# EAGLE board SCSI_V1.0.1 (EAGLE 4.09), part 1 of 2
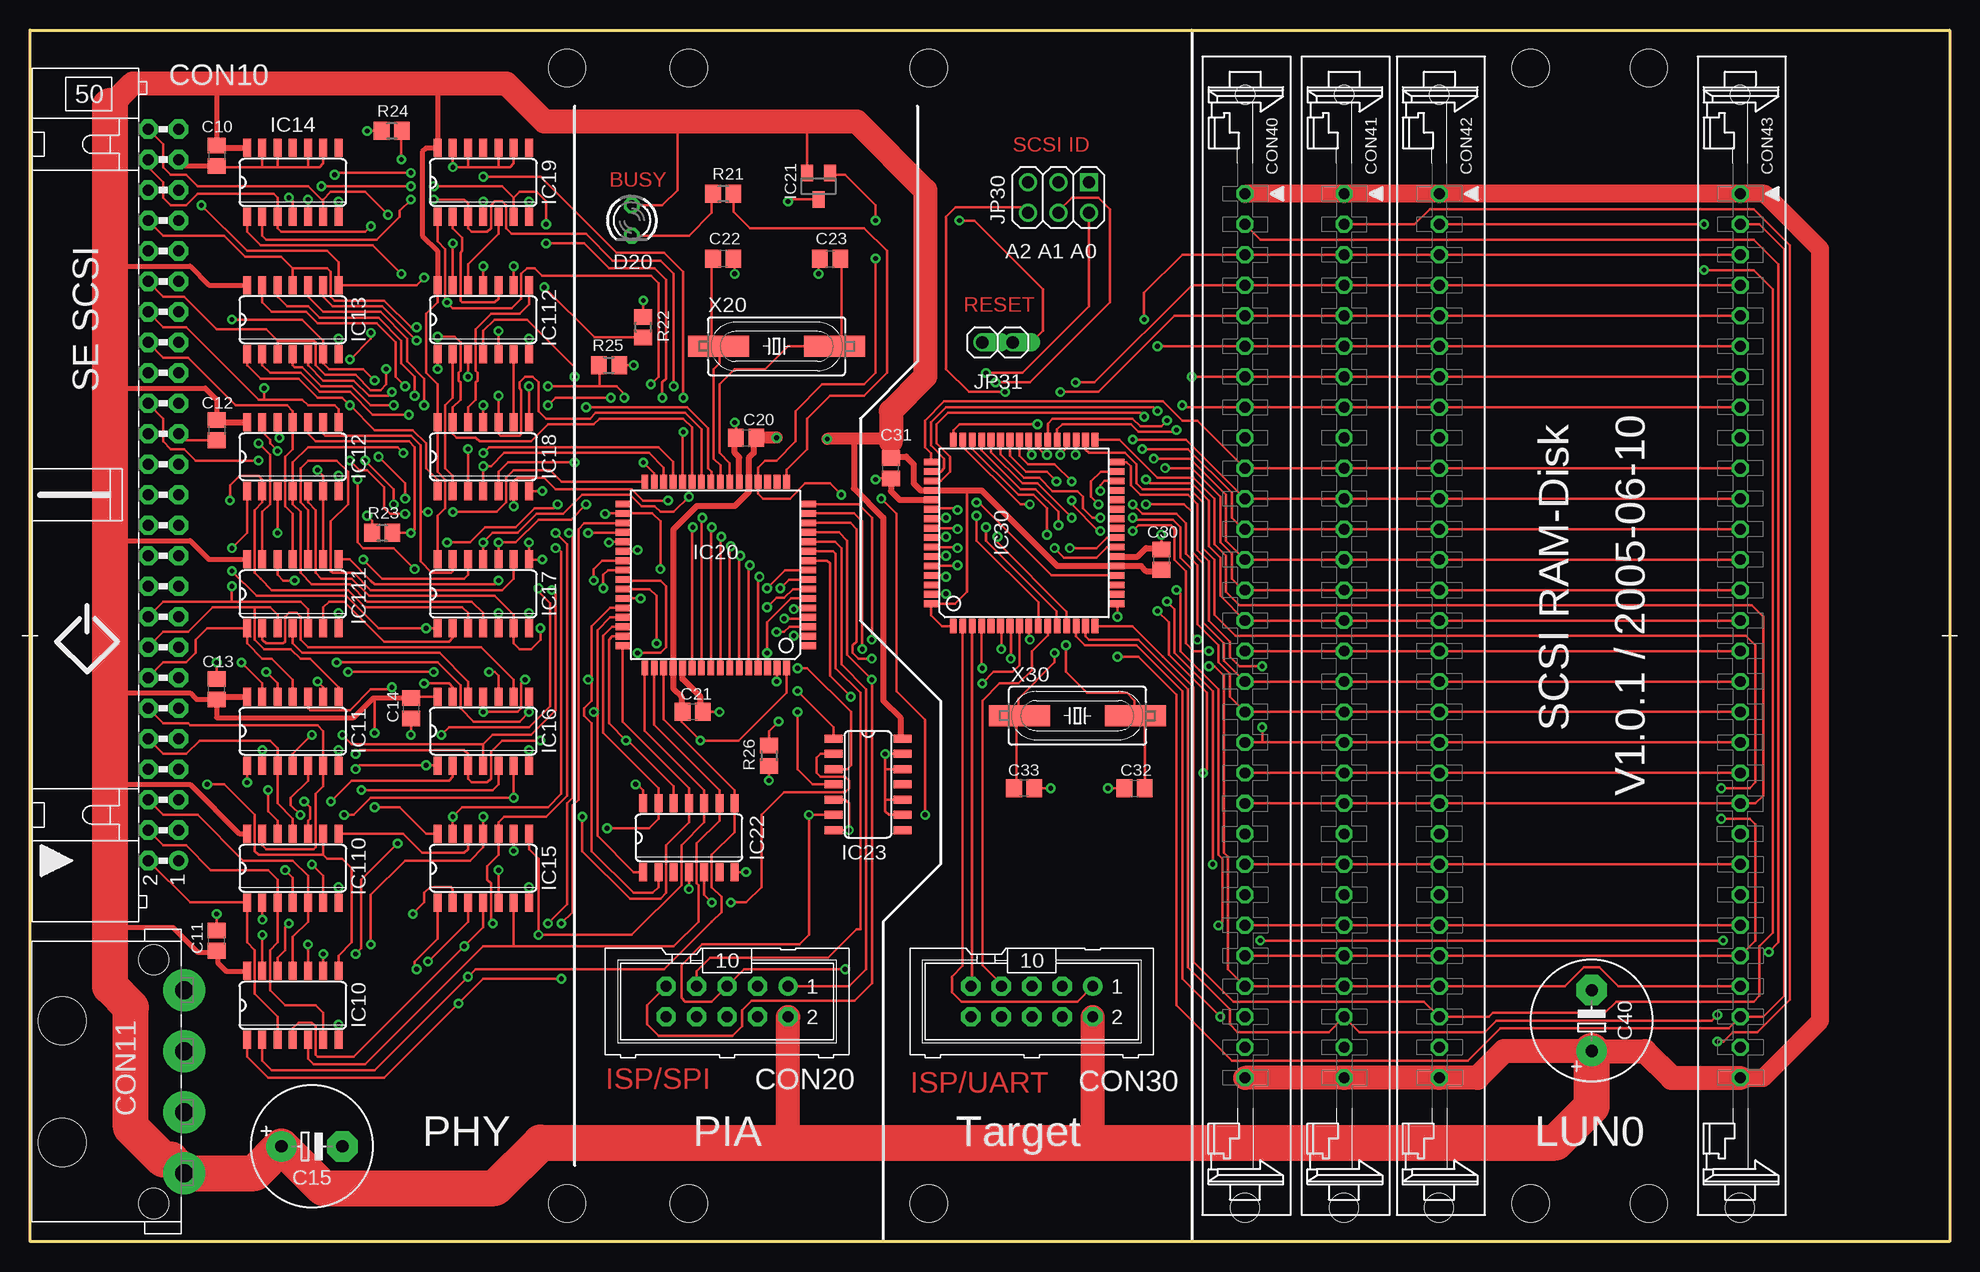
[diagram p0: board, top side]
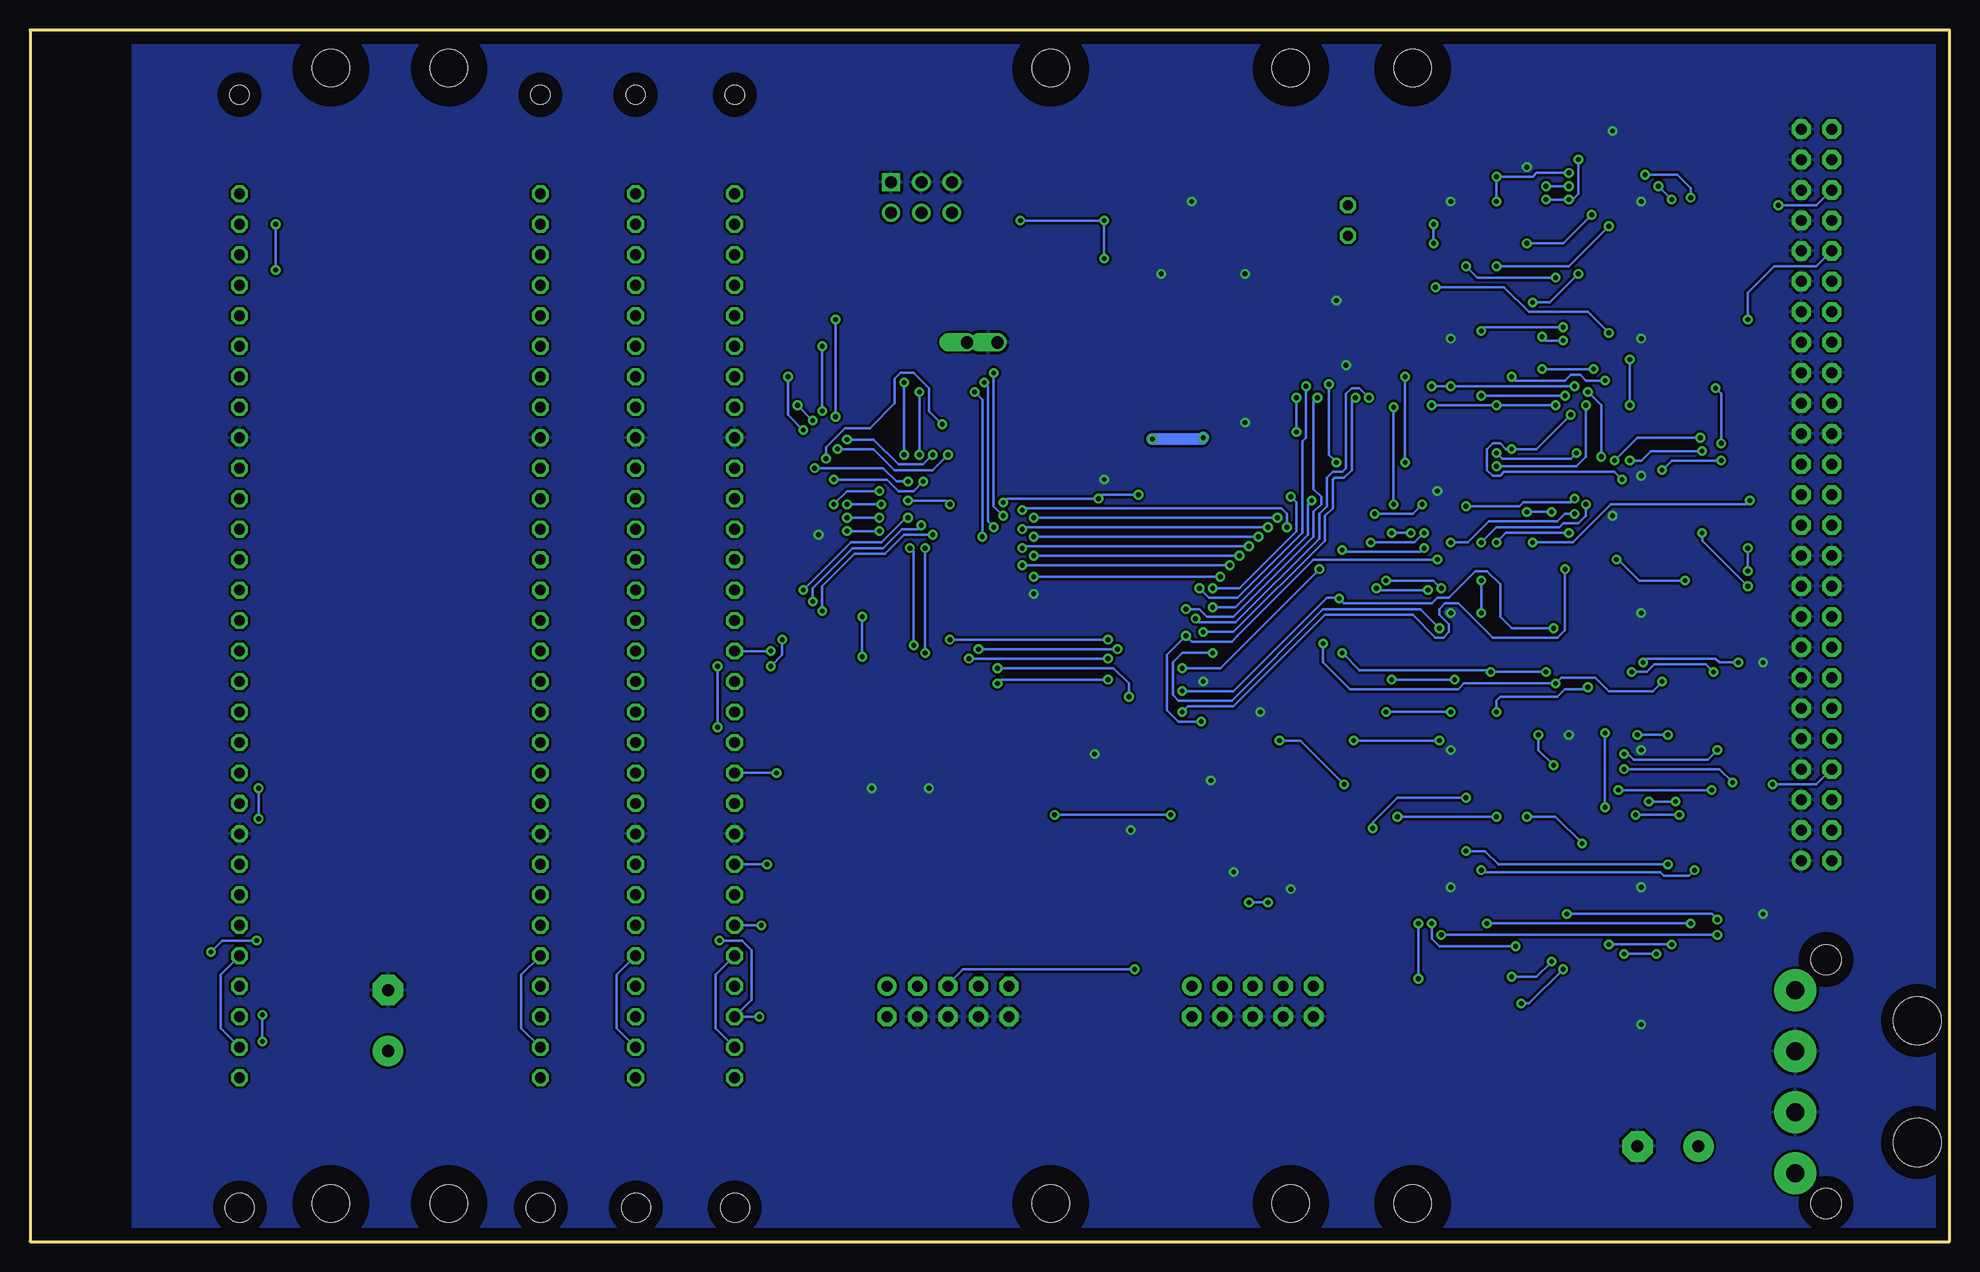
[diagram p1: board, bottom side, seen from below]

Size 160.02 x 100.97 mm. Coordinates in mm from the lower left corner, seen from the top.
Copper layers used: Top, Bottom

## Footprints (pad centres in the part's own frame; a part is rotated, then mirrored left to right if it is on the bottom)
C0805 = smd 1.3 x 1.5: 1 -0.85,0; 2 0.85,0
E5-10,5 = drill 1.016 pad 2.54 round: + -2.54,0 | drill 1.016 pad 2.54 octagon: - 2.54,0
ML50L = drill 0.914 pad 1.6 round: 1 -30.48,-1.27 | drill 0.914 pad 1.6 octagon: 2 -30.48,1.27; 3 -27.94,-1.27; 4 -27.94,1.27; 5 -25.4,-1.27; 6 -25.4,1.27; 7 -22.86,-1.27; 8 -22.86,1.27; 9 -20.32,-1.27; 10 -20.32,1.27; 11 -17.78,-1.27; 12 -17.78,1.27; 13 -15.24,-1.27; 14 -15.24,1.27; 15 -12.7,-1.27; 16 -12.7,1.27; 17 -10.16,-1.27; 18 -10.16,1.27; 19 -7.62,-1.27; 20 -7.62,1.27; 21 -5.08,-1.27; 22 -5.08,1.27; 23 -2.54,-1.27; 24 -2.54,1.27; 25 0,-1.27; 26 0,1.27; 27 2.54,-1.27; 28 2.54,1.27; 29 5.08,-1.27; 30 5.08,1.27; 31 7.62,-1.27; 32 7.62,1.27; 33 10.16,-1.27; 34 10.16,1.27; 35 12.7,-1.27; 36 12.7,1.27; 37 15.24,-1.27; 38 15.24,1.27; 39 17.78,-1.27; 40 17.78,1.27; 41 20.32,-1.27; 42 20.32,1.27; 43 22.86,-1.27; 44 22.86,1.27; 45 25.4,-1.27; 46 25.4,1.27; 47 27.94,-1.27; 48 27.94,1.27; 49 30.48,-1.27; 50 30.48,1.27
827-001-2 = drill 1.5 pad 3.5 round: 1(12V) 7.62,-10.16; 2 2.54,-10.16; 3 -2.54,-10.16; 4(5V) -7.62,-10.16 | hole 4: -5.08,0; 5.08,0 | hole 2.5: -10.16,-7.62; 10.16,-7.62
ML10 = drill 0.914 pad 1.6 round: 1 -5.08,-1.27 | drill 0.914 pad 1.6 octagon: 2 -5.08,1.27; 3 -2.54,-1.27; 4 -2.54,1.27; 5 0,-1.27; 6 0,1.27; 7 2.54,-1.27; 8 2.54,1.27; 9 5.08,-1.27; 10 5.08,1.27
SIMM30 = drill 0.9 octagon: 1 36.83,0; 2 34.29,0; 3 31.75,0; 4 29.21,0; 5 26.67,0; 6 24.13,0; 7 21.59,0; 8 19.05,0; 9 16.51,0; 10 13.97,0; 11 11.43,0; 12 8.89,0; 13 6.35,0; 14 3.81,0; 15 1.27,0; 16 -1.27,0; 17 -3.81,0; 18 -6.35,0; 19 -8.89,0; 20 -11.43,0; 21 -13.97,0; 22 -16.51,0; 23 -19.05,0; 24 -21.59,0; 25 -24.13,0; 26 -26.67,0; 27 -29.21,0; 28 -31.75,0; 29 -34.29,0; 30 -36.83,0 | hole 2.413: -47.65,0.025 | hole 1.6: 45.085,0
LED3MM = drill 0.813 octagon: A -1.27,0; K 1.27,0
SO14 = smd 0.66 x 1.5: 1 -3.81,-2.873; 2 -2.54,-2.873; 3 -1.27,-2.873; 4 0,-2.873; 5 1.27,-2.873; 6 2.54,-2.873; 7 3.81,-2.873; 8 3.81,2.873; 9 2.54,2.873; 10 1.27,2.873; 11 0,2.873; 12 -1.27,2.873; 13 -2.54,2.873; 14 -3.81,2.873
TQFP64 = smd 1.194 x 0.559: 1 -7.76,5.905; 2 -7.76,5.118; 3 -7.76,4.331; 4 -7.76,3.543; 5 -7.76,2.756; 6 -7.76,1.968; 7 -7.76,1.181; 8 -7.76,0.394; 9 -7.76,-0.394; 10 -7.76,-1.181; 11 -7.76,-1.968; 12 -7.76,-2.756; 13 -7.76,-3.543; 14 -7.76,-4.331; 15 -7.76,-5.118; 16 -7.76,-5.905; 33 7.76,-5.905; 34 7.76,-5.118; 35 7.76,-4.331; 36 7.76,-3.543; 37 7.76,-2.756; 38 7.76,-1.968; 39 7.76,-1.181; 40 7.76,-0.394; 41 7.76,0.394; 42 7.76,1.181; 43 7.76,1.968; 44 7.76,2.756; 45 7.76,3.543; 46 7.76,4.331; 47 7.76,5.118; 48 7.76,5.905 | smd 0.559 x 1.194: 17 -5.905,-7.76; 18 -5.118,-7.76; 19 -4.331,-7.76; 20 -3.543,-7.76; 21 -2.756,-7.76; 22 -1.968,-7.76; 23 -1.181,-7.76; 24 -0.394,-7.76; 25 0.394,-7.76; 26 1.181,-7.76; 27 1.968,-7.76; 28 2.756,-7.76; 29 3.543,-7.76; 30 4.331,-7.76; 31 5.118,-7.76; 32 5.905,-7.76; 49 5.905,7.76; 50 5.118,7.76; 51 4.331,7.76; 52 3.543,7.76; 53 2.756,7.76; 54 1.968,7.76; 55 1.181,7.76; 56 0.394,7.76; 57 -0.394,7.76; 58 -1.181,7.76; 59 -1.968,7.76; 60 -2.756,7.76; 61 -3.543,7.76; 62 -4.331,7.76; 63 -5.118,7.76; 64 -5.905,7.76
SOT23 = smd 1 x 1.4: 1 -0.95,-1.1; 2 0.95,-1.1; 3 0,1.1
2X03 = drill 1 square: 1 -2.54,-1.27 | drill 1 round: 2 -2.54,1.27; 3 0,-1.27; 4 0,1.27; 5 2.54,-1.27; 6 2.54,1.27
1X02 = drill 1.016 offset: 1 -1.27,0; 2 1.27,0
R0805 = smd 1.3 x 1.5: 1 -0.85,0; 2 0.85,0
FLOPPY = hole 3.1: -115.252,-47.307; -115.252,47.307; -85.09,47.307; -85.09,-47.307; -105.093,47.307; -105.093,-47.307; -34.925,47.307; -34.925,-47.307; -25.082,47.307; -25.082,-47.307
SM49 = smd 5.08 x 1.778: 1 -4.826,0; 2 4.826,0

## Placement (x,y rotation side)
C10  100n  [C0805]  15.56,90.49 270 top
C11  100n  [C0805]  15.56,25.08 90 top
C12  100n  [C0805]  15.56,67.63 270 top
C13  100n  [C0805]  15.56,46.04 90 top
C14  100n  [C0805]  31.75,44.45 270 top
C15  100u  [E5-10,5]  23.5,7.94 0 top
C20  100n  [C0805]  59.69,66.99 0 top
C21  100n  [C0805]  55.24,44.13 180 top
C22  22p  [C0805]  57.78,81.92 180 top
C23  22p  [C0805]  66.67,81.92 0 top
C30  100n  [C0805]  94.3,56.83 270 top
C31  100n  [C0805]  71.75,64.45 90 top
C32  22p  [C0805]  92.08,37.78 0 top
C33  22p  [C0805]  82.87,37.78 180 top
C40  100u  [E5-10,5]  130.18,18.41 90 top
CON10  [ML50L]  11.11,62.23 90 top
CON11  AMP 827-001-2  [827-001-2]  2.7,13.34 90 top
CON20  ISP/SPI  [ML10]  58.1,20 180 top
CON30  ISP/UART  [ML10]  83.5,20 180 top
CON40  [SIMM30]  101.28,50.48 90 top
CON41  [SIMM30]  109.54,50.48 90 top
CON42  [SIMM30]  117.47,50.48 90 top
CON43  [SIMM30]  142.56,50.48 90 top
D20  BUSY  [LED3MM]  50.16,85.09 270 top
IC10  74F38  [SO14]  21.91,19.68 0 top
IC11  74F38  [SO14]  21.91,42.55 0 top
IC12  74F38  [SO14]  21.91,65.41 0 top
IC13  74F38  [SO14]  21.91,76.83 0 top
IC14  74F38  [SO14]  21.91,88.27 0 top
IC15  74ALS125  [SO14]  37.78,31.11 0 top
IC16  74ALS125  [SO14]  37.78,42.55 0 top
IC17  74ALS125  [SO14]  37.78,53.98 0 top
IC18  74ALS125  [SO14]  37.78,65.41 0 top
IC19  74ALS125  [SO14]  37.78,88.27 0 top
IC20  ATmega165  [TQFP64]  57.15,55.56 180 top
IC21  DS1811  [SOT23]  65.72,87.95 180 top
IC22  74HCT280  [SO14]  54.93,33.66 0 top
IC23  74HCT126  [SO14]  69.85,38.1 270 top
IC30  ATmega64  [TQFP64]  82.87,59.05 90 top
IC110  74ALS14  [SO14]  21.91,31.11 0 top
IC111  74ALS14  [SO14]  21.91,53.98 0 top
IC112  74ALS14  [SO14]  37.78,76.83 0 top
JP30  SCSI ID  [2X03]  85.72,87 180 top
JP31  RESET  [1X02]  80.64,74.93 0 top
R21  270  [R0805]  57.78,87.31 180 top
R22  0  [R0805]  51.12,76.2 90 top
R23  560  [R0805]  29.37,59.05 180 top
R24  560  [R0805]  30.16,92.55 180 top
R25  560  [R0805]  48.26,73.03 0 top
R26  560  [R0805]  61.59,40.48 270 top
U$7  [FLOPPY]  160.02,50.48 0 top
X20  16M  [SM49]  62.23,74.61 0 top
X30  16M  [SM49]  87.31,43.81 180 top

## Library data of the parts
C10-C15 C20-C23 C30-C33 C40 R21-R26 = rcl
CON10 CON20 CON30 = con-ml
CON11 CON40-CON43 = con-amp
D20 = led
IC10-IC19 IC22 IC23 IC110-IC112 = 74xx-eu
IC20 IC30 = atmel
IC21 = supervisor
JP30 JP31 = pinhead
U$7 = BOARD
X20 X30 = crystal

## Nets
+5V: C10.1 C11.1 C12.1 C13.1 C14.1 C15.+ C20.2 C21.2 C30.2 C31.2 C40.+ CON11.4(5V) CON20.2 CON30.2 CON40.1 CON40.30 CON41.1 CON41.30 CON42.1 CON42.30 CON43.1 CON43.30 D20.A IC10.14 IC11.14 IC12.14 IC13.14 IC14.14 IC15.14 IC16.14 IC17.14 IC18.14 IC19.14 IC20.21 IC20.52 IC20.64 IC21.2 IC22.14 IC23.14 IC30.1 IC30.21 IC30.52 IC30.64 IC110.14 IC111.14 IC112.14
/ACK: CON10.38 IC12.8 IC111.13
/ATN: CON10.32 IC12.6 IC111.9
/BSY: CON10.36 IC12.11 IC111.11
/C/D: CON10.46 IC13.8 IC112.9
/CAS0: CON40.2 CON40.28 IC30.14
/CAS1: CON41.2 CON41.28 IC30.15
/CAS2: CON42.2 CON42.28 IC30.16
/CAS3: CON43.2 CON43.28 IC30.17
/D0: CON10.2 IC10.3 IC110.1
/D1: CON10.4 IC10.6 IC110.3
/D2: CON10.6 IC10.11 IC110.5
/D3: CON10.8 IC10.8 IC110.9
/D4: CON10.10 IC11.3 IC110.11
/D5: CON10.12 IC11.6 IC110.13
/D6: CON10.14 IC11.11 IC111.1
/D7: CON10.16 IC11.8 IC111.3
/I/O: CON10.50 IC14.6 IC112.13
/MSG: CON10.42 IC13.6 IC112.3
/P: CON10.18 IC12.3 IC111.5
/PIA_ACK: CON20.9 IC20.13 IC30.8
/PIA_IRQ: IC20.16 IC30.9
/PIA_RD: IC20.14 IC30.7
/PIA_WR: IC20.15 IC30.6
/RAS: CON40.27 CON41.27 CON42.27 CON43.27 IC30.43
/RE_ACK: IC12.9 IC17.13 IC20.32
/RE_ATN: IC12.4 IC17.4 IC20.29
/RE_BSY: IC12.12 IC17.10 IC20.25
/RE_C/D: IC13.9 IC18.13 IC20.27
/RE_D0: IC10.1 IC15.1 IC20.35
/RE_D1: IC10.4 IC15.4 IC20.36
/RE_D2: IC10.12 IC15.10 IC20.37
/RE_D3: IC10.9 IC15.13 IC20.38
/RE_D4: IC11.1 IC16.1 IC20.39
/RE_D5: IC11.4 IC16.4 IC20.40
/RE_D6: IC11.12 IC16.10 IC20.41
/RE_D7: IC11.9 IC16.13 IC20.42
/RE_I/O: IC14.4 IC19.4 IC20.28
/RE_MSG: IC13.4 IC18.4 IC20.30
/RE_P: IC12.1 IC17.1 IC20.43 IC23.1
/RE_REQ: IC14.1 IC19.1 IC20.31
/RE_RST: IC13.1 IC18.1 R22.1
/RE_SEL: IC13.12 IC18.10 IC20.26
/REQ: CON10.48 IC14.3 IC112.11
/RESET: CON20.5 CON30.5 IC20.20 IC21.1 IC23.6 IC30.20 JP31.2
/RST: CON10.40 IC13.3 IC112.1
/SEL: CON10.44 IC13.11 IC112.5
/W: CON40.21 CON41.21 CON42.21 CON43.21 IC30.33
ACK: IC12.10 IC17.11 IC20.9 R23.1
ATN: IC12.5 IC17.6 IC20.6
BSY: IC12.13 IC17.8 IC20.2 R26.1
C/D: IC13.10 IC18.11 IC20.4
D0: IC10.2 IC15.3 IC20.51 IC22.8
D1: IC10.5 IC15.6 IC20.50 IC22.9
D2: IC10.13 IC15.8 IC20.49 IC22.10
D3: IC10.10 IC15.11 IC20.48 IC22.11
D4: IC11.2 IC16.3 IC20.47 IC22.12
D5: IC11.5 IC16.6 IC20.46 IC22.13
D6: IC11.13 IC16.8 IC20.45 IC22.1
D7: IC11.10 IC16.11 IC20.44 IC22.2
EN_PHY: IC20.33
GND: C10.2 C11.2 C12.2 C13.2 C14.2 C15.- C20.1 C21.1 C22.1 C23.1 C30.1 C31.1 C32.1 C33.1 C40.- CON10.1 CON10.3 CON10.5 CON10.7 CON10.9 CON10.11 CON10.13 CON10.15 CON10.17 CON10.19 CON10.20 CON10.21 CON10.22 CON10.29 CON10.30 CON10.31 CON10.33 CON10.34 CON10.35 CON10.37 CON10.39 CON10.41 CON10.43 CON10.45 CON10.47 CON10.49 CON11.2 CON11.3 CON20.4 CON20.6 CON20.8 CON20.10 CON30.4 CON30.6 CON30.8 CON30.10 CON40.9 CON40.22 CON41.9 CON41.22 CON42.9 CON42.22 CON43.9 CON43.22 IC10.7 IC11.7 IC12.7 IC13.7 IC14.7 IC14.9 IC14.10 IC14.12 IC14.13 IC15.7 IC16.7 IC17.7 IC18.7 IC19.7 IC19.9 IC19.10 IC19.12 IC19.13 IC20.22 IC20.53 IC20.63 IC21.3 IC22.4 IC22.7 IC23.5 IC23.7 IC23.9 IC23.10 IC23.12 IC23.13 IC30.22 IC30.53 IC30.63 IC110.7 IC111.7 IC112.7 JP30.1 JP30.3 JP30.5 JP31.1 R22.2 R23.2 R24.2 R25.2 R26.2
I/O: IC14.5 IC19.6 IC20.5
ID_A0: IC30.10 JP30.2
ID_A1: IC30.12 JP30.4
ID_A2: IC30.13 JP30.6
MOSI: CON20.1 IC20.12
MSG: IC13.5 IC18.6 IC20.7
N$1: IC15.2 IC110.2
N$3: IC15.5 IC110.4
N$4: IC15.9 IC110.6
N$5: IC20.17 R21.1
N$6: D20.K R21.2
N$7: C33.2 IC30.23 X30.2
N$8: C23.2 IC20.23 X20.2
N$9: C22.2 IC20.24 X20.1
N$10: C32.2 IC30.24 X30.1
N$11: IC15.12 IC110.8
N$12: IC16.2 IC110.10
N$13: IC16.5 IC110.12
N$14: IC16.9 IC111.2
N$15: IC16.12 IC111.4
N$16: IC17.2 IC111.6
N$17: IC17.5 IC111.8
N$18: IC17.9 IC111.10
N$19: IC17.12 IC111.12
N$20: IC18.2 IC112.2
N$21: IC18.5 IC112.4
N$22: IC18.9 IC112.6
N$23: IC18.12 IC112.8
N$24: IC19.2 IC112.10
N$25: IC19.5 IC112.12
ODD_P: IC22.5 IC23.2
P: IC12.2 IC17.3 IC20.34 IC23.3
PD_SCK: CON30.7 IC30.11
PDI: CON30.1 IC30.2
PDO: CON30.9 IC30.3
PIA_A0: IC20.10 IC30.4
PIA_D0: IC20.61 IC30.61
PIA_D1: IC20.60 IC30.60
PIA_D2: IC20.59 IC30.59
PIA_D3: IC20.58 IC30.58
PIA_D4: IC20.57 IC30.57
PIA_D5: IC20.56 IC30.56
PIA_D6: IC20.55 IC30.55
PIA_D7: IC20.54 IC30.54
RAM_A0: CON40.4 CON41.4 CON42.4 CON43.4 IC30.35
RAM_A1: CON40.5 CON41.5 CON42.5 CON43.5 IC30.36
RAM_A2: CON40.7 CON41.7 CON42.7 CON43.7 IC30.37
RAM_A3: CON40.8 CON41.8 CON42.8 CON43.8 IC30.38
RAM_A4: CON40.11 CON41.11 CON42.11 CON43.11 IC30.39
RAM_A5: CON40.12 CON41.12 CON42.12 CON43.12 IC30.40
RAM_A6: CON40.14 CON41.14 CON42.14 CON43.14 IC30.41
RAM_A7: CON40.15 CON41.15 CON42.15 CON43.15 IC30.42
RAM_A8: CON40.17 CON41.17 CON42.17 CON43.17 IC30.30
RAM_A9: CON40.18 CON41.18 CON42.18 CON43.18 IC30.31
RAM_A10: CON40.19 CON41.19 CON42.19 CON43.19 IC30.32
RAM_D0: CON40.3 CON41.3 CON42.3 CON43.3 IC30.51
RAM_D1: CON40.6 CON41.6 CON42.6 CON43.6 IC30.50
RAM_D2: CON40.10 CON41.10 CON42.10 CON43.10 IC30.49
RAM_D3: CON40.13 CON41.13 CON42.13 CON43.13 IC30.48
RAM_D4: CON40.16 CON41.16 CON42.16 CON43.16 IC30.47
RAM_D5: CON40.20 CON41.20 CON42.20 CON43.20 IC30.46
RAM_D6: CON40.23 CON41.23 CON42.23 CON43.23 IC30.45
RAM_D7: CON40.25 CON41.25 CON42.25 CON43.25 IC30.44
RAM_P: CON40.26 CON40.29 CON41.26 CON41.29 CON42.26 CON42.29 CON43.26 CON43.29 IC30.34
REQ: IC14.2 IC19.3 IC20.8 R24.1
RST: IC13.2 IC18.3 IC23.4
SCK: CON20.7 IC20.11
SEL: IC13.13 IC18.8 IC20.3 R25.1
TERMPWR: CON10.26